# Altium PCB MAB17_sem_malha.PcbDoc (part 2 of 2)
Units mil, origin at the board's own origin, x right, y up, seen from the top; angles counter-clockwise.
Board outline 6100 x 4200 mil, 2 copper layers (Top Layer, Bottom Layer); 83 components, 57 nets, 272 pads, 21 vias.
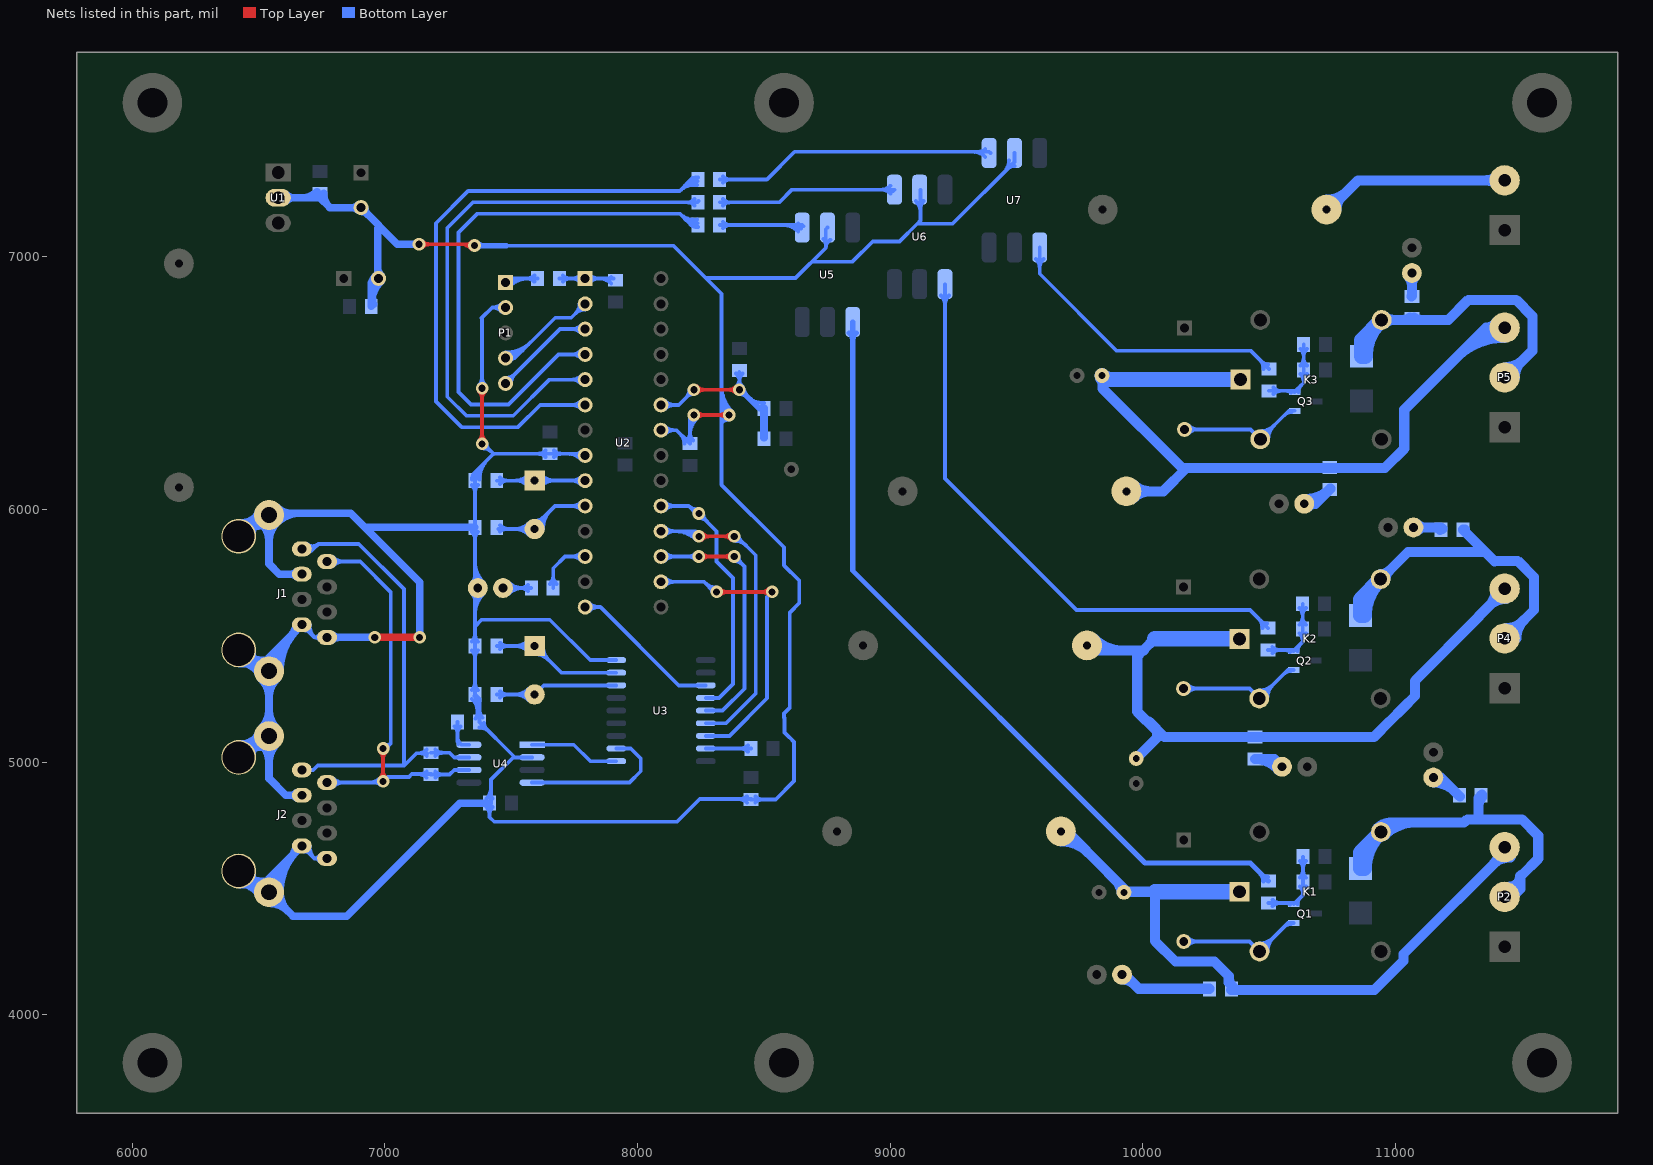
[diagram p2: the nets of this part, all layers, seen from the top]

## Via types
v1: diameter 50, hole 28, Top Layer to Bottom Layer, 21 vias

## Nets (pads, with @x,y where several pads share a name; then routed paths per layer and width w, separated by ;. In a path a pad name is that pad's centre, name@x,y a point inside that pad or via, vN(x,y) a via of type N, cw(c..) or ccw(c..) an arc to the next point about the centre after c; other vN are vias at no path point) (continued)
CAN_GND: C1.2 C2.2 C3.2 C4.1 C5.1 C6.1 C7.1 C8.1 C11.2 C12.1 C13.1 C14.2 J1.3 J1.7 J1.8 J1.S J2.3 J2.7 J2.8 J2.S LD1.2 P1.2 R7.2 U1.2 U2.8 U2.22 U3.9 U4.2 U5.2 U6.2 U7.2 | length 24567.2
  Top Layer w15: v1(7135,7050) v1@7339.5,7050 ; v1@7147.37,7037.63 cw(c7177.25,7007.75) 7177.25,7050 cw(c7177.25,7092.25) v1@7147.37,7062.37 ; 7300.68,7050 cw(c7300.68,6990.68) v1@7342.63,7032.63 ; 7324.82,7050 ccw(c7324.82,7075.18) v1@7342.63,7057.37 ; v1@7372.63,6272.37 ccw(c7342.75,6302.25) 7385,6302.25 ccw(c7427.25,6302.25) v1@7397.37,6272.37 ; v1@7372.63,6467.63 cw(c7342.75,6437.75) 7385,6437.75 cw(c7427.25,6437.75) v1@7397.37,6467.63 ; v1(7385,6260) v1(7385,6480) ; v1(8223,6374) v1(8363,6374) ; v1@8235.37,6361.63 cw(c8265.25,6331.75) 8265.25,6374 cw(c8265.25,6416.25) v1@8235.37,6386.37 ; v1@8350.63,6361.63 ccw(c8320.75,6331.75) 8320.75,6374 ccw(c8320.75,6416.25) v1@8350.63,6386.37
  Top Layer w20: v1@7339.5,7050 7344.5,7045 v1(7355,7045)
  Top Layer w30: v1(6960,5494) v1(7138,5494)
  Bottom Layer w15: J2.7@6671.43,4669 6721.43,4619 ; J1.7@6671.43,5544 6721.43,5494 ; J2.7@6681.27,4646.97 cw(c6681.27,4617.56) 6702.07,4638.36 ; J1.7@6681.27,5521.97 cw(c6681.27,5492.56) 6702.07,5513.36 ; J2.7@6688.28,4668.52 ccw(c6721.99,4666.22) 6698.1,4642.33 ; J1.7@6688.28,5543.52 ccw(c6721.99,5541.22) 6698.1,5517.33 ; J2.7@6703.24,4667.5 ccw(c6765.66,4663.24) 6721.42,4619 ; J1.7@6703.24,5542.5 ccw(c6765.66,5538.24) 6721.42,5494 ; J2.8@6743.01,4607.16 ccw(c6721.43,4593.41) 6721.43,4619 ; J2.8@6743.01,4630.84 cw(c6721.43,4644.59) 6721.43,4619 ; J1.8@6743.01,5482.16 ccw(c6721.43,5468.41) 6721.43,5494 ; J1.8@6743.01,5505.84 cw(c6721.43,5519.59) 6721.43,5494 ; J2.8@6771.43,4619 6721.43,4619 ; J1.8@6771.43,5494 6721.43,5494 ; C13.1@7343.59,5251.21 cw(c7268.7,5176.32) R7.2@7374.61,5176.32 ; C13.1@7343.59,5284.67 ccw(c7312.71,5315.55) 7356.39,5315.55 ccw(c7400.06,5315.55) C13.1@7369.18,5284.67 ; C12.1@7343.59,5443.33 cw(c7312.71,5412.45) 7356.39,5412.45 cw(c7400.06,5412.45) C12.1@7369.18,5443.33 ; C12.1@7343.59,5476.79 ccw(c7312.71,5507.67) 7356.39,5507.67 ccw(c7400.06,5507.67) C12.1@7369.18,5476.79 ; C8.1@7343.59,5912.27 cw(c7312.71,5881.39) 7356.39,5881.39 cw(c7400.06,5881.39) C8.1@7369.18,5912.27 ; C7.1@7343.59,6097.27 cw(c7312.71,6066.39) 7356.39,6066.39 cw(c7400.06,6066.39) C7.1@7369.18,6097.27 ; C7.1@7344.48,6117.94 cw(c7386.82,6117.94) 7356.88,6147.88 ; LD1.2@7345.46,5666.46 cw(c7319.1,5640.1) 7356.39,5640.1 ; LD1.2@7345.46,5711.54 ccw(c7319.1,5737.9) 7356.39,5737.9 ; C7.1@7348.21,6134.07 ccw(c7341.46,6147.38) 7356.39,6147.38 ; C13.1@7354.2,5261.81 cw(c7304.92,5212.53) 7374.61,5212.53 ; 7356.39,5584.02 cw(c7472.98,5584.02) LD1.2@7390.54,5666.46 ; 7356.39,5620.23 cw(c7436.77,5620.23) LD1.2@7379.93,5677.07 ; 7356.39,5757.77 ccw(c7436.77,5757.77) LD1.2@7379.93,5700.93 ; 7356.39,5793.98 ccw(c7472.98,5793.98) LD1.2@7390.54,5711.54 ; R7.2@7358.95,5171.98 ccw(c7310.88,5199.73) 7364.49,5214.1 ; C7.1@7359.48,6117.94 cw(c7438.03,6117.94) 7382.49,6173.49 ; R7.2@7361.82,5175.73 ccw(c7330.94,5206.61) 7374.61,5206.61 ccw(c7418.29,5206.61) R7.2@7387.41,5175.73 ; C7.1@7364.56,6134.07 cw(c7371.31,6147.38) 7356.39,6147.38 ; 7368.82,5197.94 ccw(c7399.58,5206.19) R7.2@7383.66,5178.6 ; v1@7372.63,6492.37 ccw(c7342.75,6522.25) 7385,6522.25 ccw(c7427.25,6522.25) v1@7397.37,6492.37 ; C7.1@7374.48,6117.94 cw(c7489.25,6117.94) 7408.09,6199.09 ; R7.2@7374.61,5136.97 cw(c7374.61,5083.79) 7412.22,5121.4 ; 7383,6758 7385,6760 ; v1@7385,6242.5 cw(c7385,6188.18) 7423.41,6226.59 ; v1(7385,6260) 7385,6265 7429.5,6220.5 ; v1(7385,6480) 7385,6760 ; R7.2@7392.7,5155.06 ccw(c7426.87,5155.06) 7402.71,5130.9 ; C11.2@7401.9,4822.27 cw(c7371.02,4791.39) 7414.69,4791.39 cw(c7458.37,4791.39) C11.2@7427.48,4822.27 ; C11.2@7401.9,4855.73 ccw(c7357,4900.63) 7420.5,4900.63 ; v1@7402.5,6260 ccw(c7432.68,6260) 7411.34,6238.66 ; C11.2@7414.69,4830 7414.69,4782.31 7433,4764 8156.64,4764 8246.64,4854 C14.2@8449.69,4854 ; C11.2@7420.5,4844.81 7420.5,4931.5 7508,5019 ; 7420.5,4872.59 ccw(c7444.35,4872.59) C11.2@7427.48,4855.73 ; 7427.24,6800 ccw(c7427.24,6849.76) P1.2@7462.42,6814.58 ; 7430,6220 7429.5,6220.5 ; P1.2@7461.9,6783.97 ccw(c7425,6749.53) 7425,6800 ; P1.2@7480,6800 7477,6800 7425,6800 ; 7481.39,7044 8143,7044 8333,6854 8333,6344 ; U4.2@7583,5019 7508,5019 ; C1.2@7636.27,6207.9 ccw(c7605.39,6177.02) 7605.39,6220.69 ccw(c7605.39,6264.37) C1.2@7636.27,6233.48 ; C1.2@7669.73,6207.9 cw(c7700.61,6177.02) 7700.61,6220.69 cw(c7700.61,6264.37) C1.2@7669.73,6233.48 ; 7723.66,6220.69 cw(c7723.66,6144.66) U2.8@7777.42,6198.42 ; 7755.98,6220.69 ccw(c7755.98,6251.02) U2.8@7777.42,6229.58 ; 7759.88,6220.69 cw(c7759.88,6180.88) U2.8@7788.03,6209.03 ; U2.8@7793,6214 7786.31,6220.69 C1.2@7653,6220.69 7429.69,6220.69 7429.5,6220.5 ; U3.9@7915.83,5404 7813,5404 7653,5564 7383,5564 7356.39,5537.39 ; U2.22@8093,6314 8154.61,6314 C6.1@8208,6260.61 8208,6359 v1(8223,6374) ; U2.22@8108.58,6298.42 cw(c8146.18,6260.82) 8146.18,6314 cw(c8146.18,6367.18) U2.22@8108.58,6329.58 ; 8170.4,6298.22 cw(c8132.79,6260.61) C6.1@8185.97,6260.61 ; 8179.9,6288.71 ccw(c8204.06,6312.87) C6.1@8204.06,6278.7 ; C6.1@8195.21,6273.41 ccw(c8164.33,6304.29) 8208,6304.29 ccw(c8251.67,6304.29) C6.1@8220.79,6273.41 ; 8208,6295.54 cw(c8301.46,6295.54) v1@8235.37,6361.63 ; 8208,6331.75 cw(c8265.25,6331.75) v1@8224.77,6372.23 ; 8272,6916 8626,6916 8745,7035 8745,7109 U5.2@8752,7116 ; 8333,6380.04 ccw(c8369.04,6380.04) 8343.55,6354.55 ; 8333,6416.25 ccw(c8405.25,6416.25) v1@8354.16,6365.16 ; 8333,6452.46 ccw(c8441.46,6452.46) v1@8364.77,6375.77 ; 8333,6488.68 ccw(c8477.68,6488.68) v1@8375.37,6386.37 ; v1@8345.5,6374 cw(c8303.25,6374) 8333.13,6344.13 cw(c8363,6314.25) v1@8363,6356.5 ; v1(8363,6374) 8333,6344 ; 8398.18,4854 cw(c8398.18,4804.81) C14.2@8432.96,4839.59 ; 8405.98,4854 ccw(c8405.98,4892.16) C14.2@8432.96,4865.18 ; C14.2@8449.69,4852.39 8547.39,4852.39 8620,4925 8620,5080 8600.94,5099.06 8599.4,5099.06 8581.31,5117.15 8581.31,5175.95 8580,5177.25 8580,5192.8 8603,5215.8 8603,5591.97 8640.5,5629.47 8640.5,5718.53 8580,5779.03 8580,5850.64 8333,6097.64 8333,6344 ; C14.2@8466.42,4839.59 cw(c8497.3,4808.71) 8497.3,4852.39 cw(c8497.3,4896.06) C14.2@8466.42,4865.18 ; 8695,6981 8851,6981 8931,7061 9037,7061 9107,7131 ; U5.2@8736.42,7070.9 cw(c8715.72,7050.19) 8745,7050.19 ; 8745,7034.53 cw(c8783.96,7034.53) U5.2@8763.54,7067.71 ; U6.2@9101.42,7220.9 cw(c9056.58,7176.05) 9120,7176.05 ; 9120,7190.54 cw(c9162.94,7190.54) U6.2@9132.58,7220.9 ; U6.2@9120,7265 9120,7144 9107,7131 ; 9450.53,7334.53 ccw(c9403.58,7381.47) U7.2@9469.97,7381.47 ; 9463.74,7347.74 cw(c9492,7319.48) U7.2@9492,7359.44 ; U7.2@9492,7411 9492,7376 9247,7131 9107,7131 ; 7356.39,5537.39 C8.1@7356.39,5929 C7.1@7356.39,6114 7356.39,6147.39 ; 7356.39,5537.39 C12.1@7356.39,5460.06 C13.1@7356.39,5267.94 7374.61,5249.71 R7.2@7374.61,5159 7508,5025.61 7508,5019 ; 7356.39,6147.39 7429.5,6220.5 ; 7385,6760 7425,6800
  Bottom Layer w20: v1(7355,7045) 7356,7044 7481.39,7044 ; v1@7365.61,7034.39 cw(c7388.8,7011.2) 7388.8,7044 ; v1@7365.61,7055.61 ccw(c7393.63,7083.63) 7393.63,7044
  Bottom Layer w30: J2.S@6424.89,5072.79 ccw(c6431.61,5177.31) 6505.67,5103.25 ccw(c6579.74,5029.18) J2.S@6475.21,5022.46 ; J1.S@6424.89,5947.79 ccw(c6431.61,6052.31) 6505.67,5978.25 ccw(c6579.74,5904.18) J1.S@6475.21,5897.46 ; J2.S@6425.08,4515.23 cw(c6432.08,4411.95) J2.S@6505.28,4485.15 ; J1.S@6425.08,5390.23 cw(c6432.08,5286.95) J1.S@6505.28,5360.15 ; J2.S@6465.34,4525.09 ccw(c6529.51,4589.26) J2.S@6539.9,4499.1 ; J1.S@6465.34,5400.09 ccw(c6529.51,5464.26) J1.S@6539.9,5374.1 ; J2.S@6465.6,5063.17 cw(c6529.96,4998.81) J2.S@6539.96,5089.28 ; J1.S@6465.6,5938.17 cw(c6529.96,5873.81) J1.S@6539.96,5964.28 ; 6467.68,5081.31 cw(c6483.78,5053.42) J2.S@6508.15,5074.46 ; 6467.68,5956.31 cw(c6483.78,5928.42) J1.S@6508.15,5949.46 ; 6467.93,4506.71 ccw(c6483.77,4534.13) J2.S@6507.91,4513.64 ; 6467.93,5381.71 ccw(c6483.77,5409.13) J1.S@6507.91,5388.64 ; J2.S@6475.2,4565.35 ccw(c6578.47,4558.34) J2.S@6505.28,4485.15 ; J1.S@6475.2,5440.35 ccw(c6578.47,5433.34) J1.S@6505.28,5360.15 ; 6477.89,5087.21 ccw(c6455.29,5126.35) J2.S@6498.95,5114.65 ; 6477.89,5962.21 ccw(c6455.29,6001.35) J1.S@6498.95,5989.65 ; 6478.2,4500.78 cw(c6455.94,4462.21) J2.S@6498.95,4473.74 ; 6478.2,5375.78 cw(c6455.94,5337.21) J1.S@6498.95,5348.74 ; 6487.29,4516.3 ccw(c6522.68,4536.72) J2.S@6536.68,4498.34 ; 6487.29,5391.3 ccw(c6522.68,5411.72) J1.S@6536.68,5373.34 ; 6487.6,5071.94 cw(c6523.03,5051.49) J2.S@6536.78,5090.01 ; 6487.6,5946.94 cw(c6523.03,5926.49) J1.S@6536.78,5965.01 ; J2.S@6510.35,5072.1 cw(c6435.15,4996.89) 6541.5,4996.89 cw(c6647.86,4996.89) J2.S@6572.66,5072.1 ; J2.S@6510.35,5134.4 ccw(c6435.15,5209.61) 6541.5,5209.61 ccw(c6647.86,5209.61) J2.S@6572.66,5134.4 ; J1.S@6510.35,5328.99 cw(c6435.15,5253.78) 6541.5,5253.78 cw(c6647.86,5253.78) J1.S@6572.66,5328.99 ; J1.S@6510.35,5947.1 cw(c6435.15,5871.89) 6541.5,5871.89 cw(c6647.86,5871.89) 6572.66,5947.1 cw(c6664.15,5855.6) 6664.15,5985 ; J2.S@6525.56,4485.14 cw(c6617.28,4485.14) 6552.42,4550 ; J1.S@6525.56,5360.14 cw(c6617.28,5360.14) 6552.42,5425 ; J2.S@6536.46,4528.91 cw(c6520.43,4668) J2.S@6421.43,4569 J2.S@6505.28,4485.14 ; J1.S@6536.46,5403.91 cw(c6520.43,5543) J1.S@6421.43,5444 J1.S@6505.28,5360.14 ; J2.S@6536.66,5059.46 ccw(c6521.17,4919.27) J2.S@6421.43,5019 6505.68,5103.25 J2.S@6541.5,5103.25 ; J1.S@6536.66,5934.46 ccw(c6521.17,5794.27) J1.S@6421.43,5894 6505.68,5978.25 J1.S@6541.5,5978.25 6541.5,5785.5 6583,5744 J1.3@6671.43,5744 ; J2.S@6541.5,4441.09 cw(c6541.5,4334.73) 6616.71,4409.93 cw(c6691.92,4485.14) 6585.56,4485.14 cw(c6822.13,4485.14) J2.7@6654.85,4652.42 ; J2.S@6555.56,4485.14 cw(c6719.71,4485.14) 6603.64,4601.21 ; J1.S@6555.56,5360.14 cw(c6719.71,5360.14) 6603.64,5476.21 ; J1.S@6560,5980 6545,5980 6550,5985 6865,5985 7138,5712 v1(7138,5494) ; J1.S@6572.66,6009.4 ccw(c6631.57,6068.32) 6631.57,5985 ; U1.2@6578,7234 6743,7234 6783,7194 C2.2@6905,7194 ; J1.S@6585.56,5360.14 cw(c6822.13,5360.14) J1.7@6654.85,5527.42 ; U1.2@6607.14,7219.86 cw(c6641.28,7185.72) 6641.28,7234 cw(c6641.28,7282.28) U1.2@6607.14,7248.14 ; 6629.82,4627.4 ccw(c6588.22,4669) J2.7@6647.06,4669 ; 6629.82,5502.4 ccw(c6588.22,5544) J1.7@6647.06,5544 ; J2.3@6651.31,4858.73 ccw(c6626.51,4833.93) 6626.51,4869 ccw(c6626.51,4904.07) J2.3@6651.31,4879.27 ; J1.3@6651.31,5733.73 ccw(c6626.51,5708.93) 6626.51,5744 ccw(c6626.51,5779.07) J1.3@6651.31,5754.27 ; J2.7@6671.43,4669 6541.5,4539.08 J2.S@6541.5,4485.14 ; J2.3@6671.43,4869 6608,4869 6541.5,4935.5 J2.S@6541.5,5103.25 ; J1.7@6671.43,5544 6541.5,5414.08 J1.S@6541.5,5360.14 ; 6673.19,7234 ccw(c6673.19,7316.56) C4.1@6731.57,7258.18 ; C4.1@6757.53,7250.69 ccw(c6832.9,7250.69) 6779.6,7197.4 ; J1.8@6771.43,5494 v1(6960,5494) ; J1.8@6791.54,5483.73 cw(c6816.34,5458.93) 6816.34,5494 cw(c6816.34,5529.07) J1.8@6791.54,5504.27 ; 6867.37,7194 ccw(c6867.37,7233.63) C2.2@6895.39,7205.61 ; 6872.2,7194 cw(c6872.2,7161.2) C2.2@6895.39,7184.39 ; C2.2@6905,7195 C2.2@6905,7194 ; C2.2@6906,7180 cw(c6906,7146.2) 6929.9,7170.1 ; C2.2@6921,7195 ccw(c6959.63,7195) 6932.31,7167.69 ; 6922,5930 6923,5929 C8.1@7356.39,5929 ; C5.1@6946.31,6804 6946.31,6897.31 6971.9,6922.9 6971.9,7113.1 6975,7110 6975,7115 ; C5.1@6946.31,6809.76 cw(c7080.13,6809.76) C3.2@6985.5,6904.39 ; 6946.31,6882.19 cw(c7007.71,6882.19) C3.2@6964.29,6925.61 ; 6952.76,6833.86 ccw(c6979.02,6826.82) C5.1@6955.48,6813.23 ; 6971.9,6958.46 ccw(c7018.35,6958.46) C3.2@6985.5,6925.61 ; v1(7135,7050) 7050,7050 6906,7194 C2.2@6905,7194 ; C11.2@7414,4838 7297,4838 6849,4390 6636.65,4390 J2.S@6541.5,4485.14 ; P1.2@7477,6800 P1.2@7478,6799 P1.2@7483,6794 ; J2.S@6505.28,4485.14 J2.S@6541.5,4485.14 ; J1.S@6505.28,5360.14 J1.S@6541.5,5360.14 ; J2.S@6541.5,5103.25 J1.S@6541.5,5360.14
CAN_H: J1.1 J2.1 R6.2 U4.7 | length 2196.1
  Bottom Layer w15: J2.1@6671.43,4969 6716.79,4969 6734.29,4986.5 7076.5,4986.5 7125,5035 7166,5035 R6.2@7167,5034 ; J1.1@6676.37,5837.71 ccw(c6693.29,5859.45) 6712.76,5839.97 ; J1.1@6685.58,5849.55 ccw(c6703.8,5872.96) 6724.78,5851.99 ; J1.1@6691.43,5864 J1.1@6671.43,5844 6716.79,5844 ; J1.1@6694.79,5861.39 ccw(c6714.31,5886.48) 6736.79,5864 ; J1.1@6701,5834.21 cw(c6716.79,5826.37) 6716.79,5844 ; J1.1@6701,5853.79 ccw(c6716.79,5861.63) 6716.79,5844 ; 7075,4990 7075.5,4990.5 7075.5,5685.14 6896.64,5864 6736.79,5864 ; 7129.82,5035 ccw(c7129.82,5086.55) R6.2@7166.27,5050.1 ; 7140.96,5035 cw(c7140.96,4999.2) R6.2@7166.27,5024.52 ; R6.2@7183,5037.31 7256.48,5037.31 7274.79,5019 U4.7@7333,5019 ; R6.2@7199.73,5024.52 cw(c7230.61,4993.63) 7230.61,5037.31 cw(c7230.61,5080.98) R6.2@7199.73,5050.1 ; 6716.79,5844 6736.79,5864
CAN_L: J1.2 J2.2 R6.1 U4.6 | length 2187.9
  Top Layer w15: v1@6980.63,4936.37 ccw(c6950.75,4966.25) 6993,4966.25 ccw(c7035.25,4966.25) v1@7005.37,4936.37 ; v1@6980.63,5041.63 cw(c6950.75,5011.75) 6993,5011.75 cw(c7035.25,5011.75) v1@7005.37,5041.63 ; v1(6993,4924) v1(6993,5054)
  Bottom Layer w15: J2.2@6771.43,4919 v1@6988,4919 ; J1.2@6771.43,5794 6903,5794 7023,5674 7023,5074 ; J2.2@6796.84,4903.42 cw(c6834.45,4865.82) 6834.45,4919 cw(c6834.45,4972.18) J2.2@6796.84,4934.58 ; J1.2@6796.84,5778.42 cw(c6834.45,5740.82) 6834.45,5794 cw(c6834.45,5847.18) J1.2@6796.84,5809.58 ; 6938.68,4919 ccw(c6938.68,4978.32) v1@6980.63,4936.37 ; 6962.82,4919 cw(c6962.82,4893.82) v1@6980.63,4911.63 ; v1(6993,4924) 7010.5,4941.5 7095.14,4941.5 7106.64,4953 R6.1@7183,4953 ; v1(6993,5054) 7003,5054 7023,5074 ; v1@7000.28,5069.91 ccw(c7008.7,5088.3) 7023,5074 ; v1@7010.5,5054 cw(c7028.61,5054) 7015.8,5066.8 ; 7129.82,4953 cw(c7129.82,4901.45) R6.1@7166.27,4937.9 ; 7140.96,4953 ccw(c7140.96,4988.8) R6.1@7166.27,4963.48 ; R6.1@7183,4950.69 7256.48,4950.69 7274.79,4969 U4.6@7333,4969 ; R6.1@7199.73,4937.9 cw(c7230.61,4907.02) 7230.61,4950.69 cw(c7230.61,4994.37) R6.1@7199.73,4963.48
LED: R1.2 U2.12 | length 376.5
  Bottom Layer w15: R1.2@7653.52,5705.73 ccw(c7622.63,5736.61) 7666.31,5736.61 ccw(c7709.98,5736.61) R1.2@7679.1,5705.73 ; R1.2@7666.31,5689 7666.31,5767.31 7713,5814 U2.12@7793,5814 ; U2.12@7777.42,5798.42 ccw(c7739.82,5760.82) 7739.82,5814 ccw(c7739.82,5867.18) U2.12@7777.42,5829.58
MCP2515_INT: U2.14 U3.12 | length 689.1
  Bottom Layer w15: U2.14@7793,5614 7853,5614 8163,5304 U3.12@8270.17,5304 ; U2.14@7808.58,5598.42 cw(c7846.18,5560.82) 7846.18,5614 cw(c7846.18,5667.18) U2.14@7808.58,5629.58
MCP2515_MISO: U2.18 U3.15 | length 1666
  Top Layer w15: v1(8243,5894) v1(8383,5894) ; v1@8255.37,5881.63 cw(c8285.25,5851.75) 8285.25,5894 cw(c8285.25,5936.25) v1@8255.37,5906.37 ; v1@8370.63,5881.63 ccw(c8340.75,5851.75) 8340.75,5894 ccw(c8340.75,5936.25) v1@8370.63,5906.37
  Bottom Layer w15: U2.18@8093,5914 8223,5914 v1(8243,5894) ; U2.18@8108.58,5898.42 cw(c8146.18,5860.82) 8146.18,5914 cw(c8146.18,5967.18) U2.18@8108.58,5929.58 ; 8152.47,5914 cw(c8152.47,5803.47) v1@8230.63,5881.63 ; 8188.68,5914 cw(c8188.68,5839.68) v1@8241.23,5892.23 ; 8224.89,5914 cw(c8224.89,5875.89) v1@8251.84,5902.84 ; U3.15@8270.17,5154 8350.28,5154 8468,5271.72 8468,5819 8393,5894 v1(8383,5894) ; v1@8383,5876.5 cw(c8383,5810.11) 8429.95,5857.05 ; v1@8400.5,5894 ccw(c8418.61,5894) 8405.8,5881.2
MCP2515_MOSI: U2.17 U3.14 | length 1377.8
  Top Layer w15: v1(8243,5814) v1(8383,5814) v1@8393,5814 ; v1@8255.37,5801.63 cw(c8285.25,5771.75) 8285.25,5814 cw(c8285.25,5856.25) v1@8255.37,5826.37 ; v1@8370.63,5801.63 ccw(c8340.75,5771.75) 8340.75,5814 ccw(c8340.75,5856.25) v1@8370.63,5826.37
  Bottom Layer w15: U2.17@8093,5814 v1(8243,5814) ; U2.17@8108.58,5798.42 cw(c8146.18,5760.82) 8146.18,5814 cw(c8146.18,5867.18) U2.17@8108.58,5829.58 ; v1@8230.63,5801.63 ccw(c8200.75,5771.75) 8200.75,5814 ccw(c8200.75,5856.25) v1@8230.63,5826.37 ; U3.14@8270.17,5204 8336.64,5204 8423,5290.36 8423,5774 v1(8383,5814) ; v1@8383,5796.5 cw(c8383,5754.25) 8412.87,5784.13 cw(c8442.75,5814) v1@8400.5,5814
MCP2515_SCK: U2.19 U3.13 | length 1229.2
  Bottom Layer w15: U2.19@8093,6014 8203,6014 ; U2.19@8108.58,5998.42 cw(c8146.18,5960.82) 8146.18,6014 cw(c8146.18,6067.18) U2.19@8108.58,6029.58 ; 8220.2,5996.8 cw(c8207.39,5984) v1@8225.5,5984 ; v1@8240.62,6001.34 cw(c8234.56,6045.56) 8203,6014 ; v1@8243,5966.5 cw(c8243,5924.25) 8272.87,5954.13 cw(c8302.75,5984) v1@8260.5,5984 ; U3.13@8270.17,5254 8323,5254 8378,5309 8378,5729 8313,5794 8313,5914 v1(8243,5984) 8233,5994 8223,5994 8203,6014
MCP2515_SS: U2.16 U3.16 | length 1473
  Top Layer w15: v1(8313,5674) v1(8533,5674) ; v1@8325.37,5661.63 cw(c8355.25,5631.75) 8355.25,5674 cw(c8355.25,5716.25) v1@8325.37,5686.37 ; v1@8520.63,5661.63 ccw(c8490.75,5631.75) 8490.75,5674 ccw(c8490.75,5716.25) v1@8520.63,5686.37
  Bottom Layer w15: U2.16@8093,5714 8263,5714 8303,5674 v1(8313,5674) ; U2.16@8108.58,5698.42 cw(c8146.18,5660.82) 8146.18,5714 cw(c8146.18,5767.18) U2.16@8108.58,5729.58 ; 8266.05,5710.95 ccw(c8313,5757.89) v1@8313,5691.5 ; U3.16@8270.17,5104 8363.92,5104 8513,5253.08 8513,5654 v1(8533,5674) ; 8290.2,5686.8 cw(c8277.39,5674) v1@8295.5,5674
NetC9_1: C9.1 R3.2 U2.1 | length 519.3
  Bottom Layer w15: C9.1@7691.31,6914 U2.1@7793,6914 R3.2@7906.31,6914 ; C9.1@7704.1,6901.21 cw(c7734.98,6870.33) 7734.98,6914 cw(c7734.98,6957.67) C9.1@7704.1,6926.79 ; U2.1@7777.42,6898.42 ccw(c7739.82,6860.82) 7739.82,6914 ccw(c7739.82,6967.18) U2.1@7777.42,6929.58 ; U2.1@7808.58,6898.42 cw(c7846.18,6860.82) 7846.18,6914 cw(c7846.18,6967.18) U2.1@7808.58,6929.58 ; 7849.23,6914 cw(c7849.23,6847.47) R3.2@7896.27,6894.52 ; 7881.55,6914 ccw(c7881.55,6934.82) R3.2@7896.27,6920.1
NetC12_2: C12.2 U3.8 Y2.1 | length 964.6
  Bottom Layer w15: C12.2@7443,5460.06 Y2.1@7593,5460.06 7699.06,5354 U3.8@7915.83,5354 ; C12.2@7455.79,5447.27 cw(c7486.67,5416.39) 7486.67,5460.06 cw(c7486.67,5503.74) C12.2@7455.79,5472.85 ; Y2.1@7570.02,5437.08 ccw(c7514.54,5381.6) 7514.54,5460.06 ccw(c7514.54,5538.52) Y2.1@7570.02,5483.04 ; Y2.1@7580.63,5447.69 ccw(c7550.75,5417.81) 7550.75,5460.06 ccw(c7550.75,5502.31) Y2.1@7580.63,5472.44 ; Y2.1@7593,5427.56 cw(c7593,5349.1) 7648.48,5404.58 cw(c7703.96,5460.06) Y2.1@7625.5,5460.06 ; Y2.1@7593,5442.56 cw(c7593,5400.31) 7622.87,5430.19 cw(c7652.75,5460.06) Y2.1@7610.5,5460.06
NetC13_2: C13.2 U3.7 Y2.2 | length 746
  Bottom Layer w15: C13.2@7443,5267.94 Y2.2@7593,5267.94 7629.06,5304 U3.7@7915.83,5304 ; C13.2@7455.79,5255.15 cw(c7486.67,5224.26) 7486.67,5267.94 cw(c7486.67,5311.61) C13.2@7455.79,5280.73 ; Y2.2@7570.02,5244.96 ccw(c7514.54,5189.48) 7514.54,5267.94 ccw(c7514.54,5346.4) Y2.2@7570.02,5290.92 ; Y2.2@7580.63,5255.56 ccw(c7550.75,5225.69) 7550.75,5267.94 ccw(c7550.75,5310.19) Y2.2@7580.63,5280.31
NetC15_1: C15.1 F2.1 K1.1 P2.3 R10.2 | length 3266.9
  Bottom Layer w40: F2.1@9676,4686.94 cw(c9676,4537.13) 9781.93,4643.07 ; F2.1@9676,4726 9699,4726 9859.94,4565.06 9859.94,4564.53 9906.53,4517.94 ; 9899.23,4525.24 cw(c9858.99,4485) C15.1@9915.9,4485 ; C15.1@9916.06,4486.74 ccw(c9882.12,4493.06) 9906.53,4517.47 ; C15.1@9916.07,4486.81 ccw(c9881.97,4493.39) 9906.53,4517.94 ; C15.1@9926.69,4494.44 cw(c9929.76,4517.47) 9906.53,4517.47 ; C15.1@9926.82,4494.42 cw(c9930.3,4517.94) 9906.53,4517.94 ; C15.1@9928,4484 9931.22,4487.22 10048.22,4487.22 10048.22,4291.52 10129.06,4210.69 10282.84,4210.69 10340.28,4153.24 10340.28,4127.72 R10.2@10356,4112 ; C15.1@9936,4488 9906.53,4517.47 ; 10340.28,4147.05 ccw(c10391.42,4147.05) R10.2@10355.26,4110.89 ; R10.2@10349,4099 10916.7,4099 11031.68,4213.98 11031.68,4240.38 P2.3@11455,4663.7 ; P2.3@11415,4663.7 cw(c11318.43,4663.7) 11386.72,4595.42 cw(c11455,4527.13) P2.3@11455,4623.7 ; P2.3@11447,4672 P2.3@11457,4662 ; 9906.53,4517.47 9906.53,4517.94
  Bottom Layer w60: 10048.22,4487.22 K1.1@10383.26,4487.22
NetC16_2: C16.2 Q1.2 R11.1 R12.2 | length 623.6
  Bottom Layer w15: R11.1@10497,4442.69 Q1.2@10595.31,4442.69 ; R11.1@10513.73,4429.9 cw(c10544.61,4399.02) 10544.61,4442.69 cw(c10544.61,4486.37) R11.1@10513.73,4455.48 ; 10566.11,4442.69 cw(c10566.11,4417.63) Q1.2@10583.83,4435.35 ; Q1.2@10597.71,4438.4 10633.69,4474.39 R12.2@10633.69,4526 C16.2@10633.69,4626 ; Q1.2@10612.85,4438.4 cw(c10649.39,4438.4) 10623.55,4464.24 ; R12.2@10620.9,4509.27 cw(c10590.02,4478.39) 10633.69,4478.39 cw(c10677.37,4478.39) R12.2@10646.48,4509.27 ; R12.2@10620.9,4542.73 ccw(c10590.02,4573.61) 10633.69,4573.61 ccw(c10677.37,4573.61) R12.2@10646.48,4542.73 ; C16.2@10620.9,4609.27 cw(c10590.02,4578.39) 10633.69,4578.39 cw(c10677.37,4578.39) C16.2@10646.48,4609.27
NetC17_1: C17.1 F4.1 K2.1 P4.3 R15.2 | length 3141.8
  Bottom Layer w40: F4.1@9779,5462 9799,5442 10001,5442 ; F4.1@9806.62,5489.62 ccw(c9921.57,5604.57) 9921.57,5442 ; C17.1@9974,5014.43 10056,5096.43 10056,5124 10054,5124 9978,5200 9978,5419 10001,5442 ; 10004,5442 10001,5442 ; 10025,5160 10086,5099 10914,5099 10977.63,5162.63 10978.33,5162.63 11030.68,5214.98 11030.68,5215.68 11077,5262 11077,5322 11330,5575 ; 10047.22,5488.22 10001,5442 ; 11328,5576 P4.3@11442,5690 ; 11369.22,5617.22 ccw(c11299.74,5686.7) P4.3@11398,5686.7 ; 11370.91,5618.91 cw(c11438,5551.82) P4.3@11438,5646.7
  Bottom Layer w60: 10047.22,5488.22 K2.1@10382.26,5488.22
NetC18_2: C18.2 Q2.2 R16.1 R17.2 | length 623.6
  Bottom Layer w15: R16.1@10496,5443.69 Q2.2@10594.31,5443.69 ; R16.1@10512.73,5430.9 cw(c10543.61,5400.02) 10543.61,5443.69 cw(c10543.61,5487.37) R16.1@10512.73,5456.48 ; 10565.11,5443.69 cw(c10565.11,5418.63) Q2.2@10582.83,5436.35 ; Q2.2@10596.71,5439.4 10632.69,5475.39 R17.2@10632.69,5527 C18.2@10632.69,5627 ; Q2.2@10611.85,5439.4 cw(c10648.39,5439.4) 10622.55,5465.24 ; R17.2@10619.9,5510.27 cw(c10589.02,5479.39) 10632.69,5479.39 cw(c10676.37,5479.39) R17.2@10645.48,5510.27 ; R17.2@10619.9,5543.73 ccw(c10589.02,5574.61) 10632.69,5574.61 ccw(c10676.37,5574.61) R17.2@10645.48,5543.73 ; C18.2@10619.9,5610.27 cw(c10589.02,5579.39) 10632.69,5579.39 cw(c10676.37,5579.39) C18.2@10645.48,5610.27
NetC19_1: C19.1 F5.1 K3.1 P5.3 R20.2 | length 3558.2
  Bottom Layer w40: C19.1@9840,6530 9840,6520 9840,6480 10155,6165 10958.7,6165 11034.68,6240.98 11034.68,6395.38 11359,6719.7 ; F5.1@9935,6072 10081,6072 10173,6164 ; F5.1@9962.62,6044.38 cw(c10029.29,5977.71) 10029.29,6072 cw(c10029.29,6166.29) F5.1@9962.62,6099.62 ; 11239.1,6599.8 cw(c11432,6406.89) P5.3@11432,6679.7 ; 11307.38,6668.08 cw(c11432,6543.46) P5.3@11432,6719.7 ; P5.3@11398.29,6698.18 ccw(c11359,6673.09) 11359,6719.7 ; P5.3@11398.29,6741.23 cw(c11359,6766.31) 11359,6719.7 ; P5.3@11436,6717 11433.3,6719.7 P5.3@11432,6719.7 ; 11359,6719.7 P5.3@11432,6719.7
  Bottom Layer w60: C19.1@9838.09,6529.67 ccw(c9875.38,6566.96) 9875.38,6514.22 ; C19.1@9840,6520 9845.78,6514.22 K3.1@10386.26,6514.22
NetC20_2: C20.2 Q3.2 R21.1 R22.2 | length 623.6
  Bottom Layer w15: R21.1@10500,6469.69 Q3.2@10598.31,6469.69 ; R21.1@10516.73,6456.9 cw(c10547.61,6426.02) 10547.61,6469.69 cw(c10547.61,6513.37) R21.1@10516.73,6482.48 ; 10569.11,6469.69 cw(c10569.11,6444.63) Q3.2@10586.83,6462.35 ; Q3.2@10600.71,6465.4 10636.69,6501.39 R22.2@10636.69,6553 C20.2@10636.69,6653 ; Q3.2@10615.85,6465.4 cw(c10652.39,6465.4) 10626.55,6491.24 ; R22.2@10623.9,6536.27 cw(c10593.02,6505.39) 10636.69,6505.39 cw(c10680.37,6505.39) R22.2@10649.48,6536.27 ; R22.2@10623.9,6569.73 ccw(c10593.02,6600.61) 10636.69,6600.61 ccw(c10680.37,6600.61) R22.2@10649.48,6569.73 ; C20.2@10623.9,6636.27 cw(c10593.02,6605.39) 10636.69,6605.39 cw(c10680.37,6605.39) C20.2@10649.48,6636.27
NetD1_1: D1.1 K1.5 Q1.1 | length 798.4
  Bottom Layer w15: D1.1@10162,4290.21 10422.79,4290.21 K1.5@10462,4251 10574.6,4363.6 Q1.1@10597.71,4363.6 ; D1.1@10177.58,4274.64 cw(c10215.18,4237.03) 10215.18,4290.21 cw(c10215.18,4343.39) D1.1@10177.58,4305.79 ; K1.5@10462,4267.87 ccw(c10462,4308.6) 10490.8,4279.8 ccw(c10519.6,4251) K1.5@10478.87,4251 ; K1.5@10462,4282.87 ccw(c10462,4359.81) 10516.41,4305.41 ccw(c10570.81,4251) K1.5@10493.87,4251 ; 10558.55,4347.55 cw(c10586.88,4319.22) Q1.1@10586.88,4359.29
NetD2_2: D2.2 K1.3 P2.2 R8.2 | length 1702.7
  Bottom Layer w40: K1.3@10927.73,4738.03 cw(c10984.71,4681.05) 10984.71,4761.63 ; K1.3@10942.31,4723.44 10980.5,4761.63 11271.15,4761.63 ; K1.3@10956.01,4709.74 cw(c11081.28,4584.48) 11081.28,4761.63 ; 11272,4761 11284.7,4773.7 11328,4773.7 ; 11328.28,4824.95 cw(c11379.42,4824.95) R8.2@11343.26,4861.11 ; R8.2@11342,4871 11328.28,4857.28 11328.28,4773.98 11328,4773.7 ; P2.2@11452.96,4506.8 ccw(c11450.74,4550) 11494,4550 ; P2.2@11456,4461 11494,4499 11494,4550 ; 11328,4773.7 11500.56,4773.7 11565,4709.26 11565,4618.14 11500.56,4553.7 11497.7,4553.7 11494,4550
  Bottom Layer w60: D2.2@10862,4579.58 10862,4643.13 K1.3@10942.31,4723.44 ; D2.2@10877.28,4579.58 cw(c11067.56,4579.58) K1.3@10933.01,4714.14
NetD3_1: D3.1 K2.5 Q2.1 | length 798.4
  Bottom Layer w15: D3.1@10161,5291.21 10421.79,5291.21 K2.5@10461,5252 10573.6,5364.6 Q2.1@10596.71,5364.6 ; D3.1@10176.58,5275.64 cw(c10214.18,5238.03) 10214.18,5291.21 cw(c10214.18,5344.39) D3.1@10176.58,5306.79 ; K2.5@10461,5268.87 ccw(c10461,5309.6) 10489.8,5280.8 ccw(c10518.6,5252) K2.5@10477.87,5252 ; K2.5@10461,5283.87 ccw(c10461,5360.81) 10515.41,5306.41 ccw(c10569.81,5252) K2.5@10492.87,5252 ; 10557.55,5348.55 cw(c10585.88,5320.22) Q2.1@10585.88,5360.29
NetD4_2: D4.2 K2.3 P4.2 R13.2 | length 1662.1
  Bottom Layer w40: K2.3@10941.31,5743.81 ccw(c10941.31,5793.29) 10976.3,5758.3 ; K2.3@10943,5725 11049.65,5831.65 11355.65,5831.65 ; K2.3@10960.68,5724.44 cw(c11004.73,5724.44) 10973.58,5755.58 ; R13.2@11274.26,5920 R13.2@11267.31,5920 11355.65,5831.65 ; P4.2@11438,5492 11548,5602 11548,5732.26 11483.56,5796.7 11392.44,5796.7 11392.31,5796.57 11392.31,5795 11355.65,5831.65 ; P4.2@11438,5529.85 ccw(c11438,5621.23) 11502.61,5556.61 ; P4.2@11478,5489.85 cw(c11579.76,5489.85) 11507.8,5561.8
  Bottom Layer w60: D4.2@10861,5580.58 10861,5644.13 K2.3@10941.31,5724.44 ; D4.2@10876.28,5580.58 cw(c11066.56,5580.58) K2.3@10932.01,5715.14
NetD5_1: D5.1 K3.5 Q3.1 | length 798.4
  Bottom Layer w15: D5.1@10165,6317.21 10425.79,6317.21 K3.5@10465,6278 10577.6,6390.6 Q3.1@10600.71,6390.6 ; D5.1@10180.58,6301.64 cw(c10218.18,6264.03) 10218.18,6317.21 cw(c10218.18,6370.39) D5.1@10180.58,6332.79 ; K3.5@10465,6294.87 ccw(c10465,6335.6) 10493.8,6306.8 ccw(c10522.6,6278) K3.5@10481.87,6278 ; K3.5@10465,6309.87 ccw(c10465,6386.81) 10519.41,6332.41 ccw(c10573.81,6278) K3.5@10496.87,6278 ; 10561.55,6374.55 cw(c10589.88,6346.22) Q3.1@10589.88,6386.29
NetD6_2: D6.2 K3.3 P5.2 R18.2 | length 1561.1
  Bottom Layer w40: K3.3@10945.31,6750.44 11209.15,6750.44 11288.41,6829.7 11477.56,6829.7 11542,6765.26 11542,6628 P5.2@11428,6514 ; K3.3@10959.01,6736.74 cw(c10992.08,6703.68) 10992.08,6750.44 cw(c10992.08,6797.2) K3.3@10959.01,6764.14 ; 11032.47,6750.44 ccw(c11032.47,6785.29) R18.2@11057.11,6760.65 ; R18.2@11072.89,6760.65 ccw(c11097.53,6785.29) 11097.53,6750.44 ; P5.2@11432,6562.85 ccw(c11432,6671.13) 11508.56,6594.56 ; P5.2@11472,6522.85 cw(c11556.86,6522.85) 11496.85,6582.85
  Bottom Layer w60: D6.2@10865,6606.58 10865,6670.13 K3.3@10945.31,6750.44 ; D6.2@10880.28,6606.58 cw(c11070.56,6606.58) K3.3@10936.01,6741.14
NetF3_1: F3.1 P3.2 | length 1063.6
  Bottom Layer w40: F3.1@10727,7226.06 ccw(c10727,7344.48) 10810.74,7260.74 ; F3.1@10735,7185 10852.85,7302.85 P3.2@11432,7302.85 P3.2@11450,7302.85 ; F3.1@10766.06,7187 cw(c10836.2,7187) 10786.6,7236.6 ; P3.2@11421.72,7274.57 ccw(c11353.43,7206.28) 11353.43,7302.85 ccw(c11353.43,7399.42) P3.2@11421.72,7331.13
NetLD1_1: LD1.1 R1.1 | length 365.1
  Bottom Layer w15: LD1.1@7468,5689 R1.1@7579.69,5689 ; LD1.1@7479.93,5677.07 cw(c7508.73,5648.27) 7508.73,5689 cw(c7508.73,5729.73) LD1.1@7479.93,5700.93 ; LD1.1@7490.54,5666.46 cw(c7544.94,5612.06) 7544.94,5689 cw(c7544.94,5765.94) LD1.1@7490.54,5711.54 ; R1.1@7566.9,5676.21 ccw(c7536.02,5645.33) 7536.02,5689 ccw(c7536.02,5732.67) R1.1@7566.9,5701.79
NetLD2_1: LD2.1 R8.1 | length 229.7
  Bottom Layer w40: LD2.1@11150,4919.63 cw(c11150,4800.44) R8.1@11234.28,4884.72 ; LD2.1@11150,4939 11180,4939 R8.1@11255,4864
NetLD3_1: LD3.1 R10.1 | length 415.6
  Bottom Layer w40: LD3.1@9918,4139.63 cw(c9918,4068.72) 9968.14,4118.86 ; LD3.1@9928,4159 9984,4103 R10.1@10264.69,4103
NetLD4_1: LD4.1 R13.1 | length 214.7
  Bottom Layer w40: LD4.1@11071,5929 11181,5929 R13.1@11186,5924 ; LD4.1@11084.7,5915.3 cw(c11117.76,5882.24) 11117.76,5929 cw(c11117.76,5975.76) LD4.1@11084.7,5942.7 ; 11154.97,5929 cw(c11154.97,5898.22) R13.1@11176.74,5919.98
NetLD5_1: LD5.1 R15.1 | length 223.3
  Bottom Layer w40: LD5.1@10536.13,4969.59 ccw(c10444.01,4892.7) R15.1@10444,5012.69 10520.31,5012.69 LD5.1@10550,4983
NetLD6_1: LD6.1 R18.1 | length 165.9
  Bottom Layer w40: LD6.1@11051.3,6922.3 cw(c11018.24,6889.24) 11065,6889.24 cw(c11111.76,6889.24) LD6.1@11078.7,6922.3 ; R18.1@11064,6844 11065,6845 LD6.1@11065,6936
NetLD7_1: LD7.1 R20.1 | length 307
  Bottom Layer w40: LD7.1@10639,6023 10683,6023 ; LD7.1@10639.87,6042.35 ccw(c10645.95,6178.04) 10742,6082 10683,6023 ; LD7.1@10653.29,6009.92 cw(c10683,5982.72) 10683,6023 ; LD7.1@10653.29,6036.08 ccw(c10683,6063.28) 10683,6023
NetR5_2: R5.2 U3.17 | length 248.1
  Bottom Layer w15: U3.17@8270.17,5054 R5.2@8449.69,5054 ; R5.2@8436.9,5041.21 ccw(c8406.02,5010.33) 8406.02,5054 ccw(c8406.02,5097.67) R5.2@8436.9,5066.79
NetR7_1: R7.1 U4.8 | length 252.9
  Bottom Layer w15: R7.1@7275.21,5142.27 cw(c7244.33,5111.39) 7288,5111.39 cw(c7331.67,5111.39) R7.1@7300.79,5142.27 ; 7288,5099.18 ccw(c7325.68,5099.18) U4.8@7299.04,5072.54 ; R7.1@7288,5159 7288,5084 ; U4.8@7290.83,5070.78 ccw(c7279.21,5075.21) 7288,5084 ; U4.8@7296.4,5073.92 cw(c7298.25,5084) 7288,5084 ; U4.8@7333,5069 7303,5069 7288,5084
NetR9_1: R9.1 U2.4 | length 2458.4
  Bottom Layer w15: U2.4@7777.42,6598.42 ccw(c7739.82,6560.82) 7739.82,6614 ccw(c7739.82,6667.18) U2.4@7777.42,6629.58 ; U2.4@7793,6614 7687.79,6614 7489.79,6416 7341.28,6416 7292,6465.28 7292,7096 7367,7171 8167,7171 ; 8188.28,7149.72 ccw(c8230.04,7191.49) R9.1@8238.26,7133 ; 8209.55,7128.45 ccw(c8235.29,7154.18) R9.1@8240.35,7118.14 ; R9.1@8217,7121 8167,7171 ; R9.1@8236.18,7147.85 cw(c8224.8,7228.79) 8167,7171
NetR9_2: R9.2 U5.1 | length 526
  Bottom Layer w15: R9.2@8325.31,7126 8652,7126 U5.1@8657,7121 ; R9.2@8338.1,7113.21 cw(c8368.98,7082.33) 8368.98,7126 cw(c8368.98,7169.67) R9.2@8338.1,7138.79 ; 8574.68,7126 cw(c8574.68,7038.68) U5.1@8636.42,7100.42 ; 8610.89,7126 cw(c8610.89,7074.89) U5.1@8647.03,7111.03 ; U5.1@8622.96,7126 ccw(c8622.96,7145.04) U5.1@8636.42,7131.58
NetR11_2: R11.2 U5.4 | length 3271.1
  Bottom Layer w20: U5.4@8838.19,6698.65 cw(c8804.86,6665.31) 8852,6665.31 cw(c8899.14,6665.31) U5.4@8865.81,6698.65 ; U5.4@8852,6741.98 8852,5758 10009,4601 10425.31,4601 R11.2@10497,4529.31 ; 10463.66,4562.64 cw(c10430.33,4529.31) R11.2@10477.47,4529.31 ; R11.2@10473.17,4553.14 ccw(c10493.06,4573.03) R11.2@10493.06,4544.9
NetR14_1: R14.1 U2.5 | length 2495.8
  Bottom Layer w15: U2.5@7777.42,6498.42 ccw(c7739.82,6460.82) 7739.82,6514 ccw(c7739.82,6567.18) U2.5@7777.42,6529.58 ; U2.5@7793,6514 7651.43,6514 7508.43,6371 7322.64,6371 7247,6446.64 7247,7114.64 7348.36,7216 8237,7216 R14.1@8242,7221 ; R14.1@8225.9,7203.21 ccw(c8195.02,7172.33) 8195.02,7216 ccw(c8195.02,7259.67) R14.1@8225.9,7228.79
NetR14_2: R14.2 U6.1 | length 871.6
  Bottom Layer w15: R14.2@8325.31,7216 8562,7216 8612,7266 U6.1@9017,7266 U6.1@9012,7261 ; R14.2@8338.1,7203.21 cw(c8368.98,7172.33) 8368.98,7216 cw(c8368.98,7259.67) R14.2@8338.1,7228.79 ; U6.1@9001.42,7250.42 ccw(c8963.82,7212.82) 8963.82,7266 ccw(c8963.82,7319.18) U6.1@9001.42,7281.58
NetR16_2: R16.2 U6.4 | length 2445.6
  Bottom Layer w15: U6.4@9201.42,6846.88 cw(c9163.82,6809.28) 9217,6809.28 cw(c9270.18,6809.28) U6.4@9232.58,6846.88 ; U6.4@9217,6891.98 9217,6123 9738,5602 10424.31,5602 R16.2@10496,5530.31 ; 10458.4,5567.91 cw(c10420.79,5530.31) R16.2@10473.97,5530.31 ; 10467.9,5558.41 ccw(c10492.06,5582.57) R16.2@10492.06,5548.4
NetR19_1: R19.1 U2.6 | length 2714.6
  Bottom Layer w15: U2.6@7777.42,6398.42 ccw(c7739.82,6360.82) 7739.82,6414 ccw(c7739.82,6467.18) U2.6@7777.42,6429.58 ; U2.6@7793,6414 7615.07,6414 7527.07,6326 7304,6326 7202,6428 7202,7133.28 7329.72,7261 8167,7261 ; 8188.28,7282.28 cw(c8230.04,7240.51) R19.1@8238.26,7299 ; 8209.55,7303.55 cw(c8235.29,7277.82) R19.1@8240.35,7313.86 ; R19.1@8219.5,7313.5 8167,7261 ; R19.1@8236.18,7284.15 ccw(c8224.8,7203.21) 8167,7261
NetR19_2: R19.2 U7.1 | length 1271.5
  Bottom Layer w15: R19.2@8325.31,7306 8512,7306 8622,7416 9392,7416 U7.1@9397,7411 ; R19.2@8338.1,7293.21 cw(c8368.98,7262.33) 8368.98,7306 cw(c8368.98,7349.67) R19.2@8338.1,7318.79 ; 9326.75,7416 cw(c9326.75,7345.75) U7.1@9376.42,7395.42 ; 9350.89,7416 ccw(c9350.89,7452.11) U7.1@9376.42,7426.58
NetR21_2: R21.2 U7.4 | length 1320.2
  Bottom Layer w15: U7.4@9576.42,6991.88 cw(c9538.82,6954.28) 9592,6954.28 cw(c9645.18,6954.28) U7.4@9607.58,6991.88 ; U7.4@9592,7036.98 9592,6933 9897,6628 10428.31,6628 R21.2@10500,6556.31 ; 10462.4,6593.91 cw(c10424.79,6556.31) R21.2@10477.97,6556.31 ; 10471.9,6584.41 ccw(c10496.06,6608.57) R21.2@10496.06,6574.4
RXCAN: U3.2 U4.4 | length 612.4
  Bottom Layer w15: U4.4@7583,4919 7968,4919 8013,4964 8013,5014 7973,5054 U3.2@7915.83,5054
TXCAN: U3.1 U4.1 | length 359.8
  Bottom Layer w15: U4.1@7583,5069 7748,5069 7813,5004 U3.1@7915.83,5004
USART_RTS: C9.2 P1.1 | length 337
  Bottom Layer w15: P1.1@7478,6899 7493,6914 C9.2@7604.69,6914 ; P1.1@7482.97,6894.03 cw(c7531.18,6845.82) 7531.18,6914 ; P1.1@7493.58,6883.42 cw(c7567.39,6809.61) 7567.39,6914 ; C9.2@7591.9,6901.21 ccw(c7561.02,6870.33) 7561.02,6914 ccw(c7561.02,6957.67) C9.2@7591.9,6926.79
USART_RX: P1.4 U2.2 | length 775.8
  Bottom Layer w15: P1.4@7478,6591.03 ccw(c7478,6659.56) 7526.46,6611.1 ; P1.4@7478,6599 7514.36,6599 ; P1.4@7478,6606.03 ccw(c7478,6710.78) 7552.07,6636.71 ; P1.4@7478,6621.03 ccw(c7478,6761.99) 7577.67,6662.31 ; P1.4@7497.52,6588.8 cw(c7514.36,6580.01) 7514.36,6599 ; P1.4@7497.52,6609.2 ccw(c7514.36,6617.99) 7514.36,6599 ; U2.2@7770.97,6814 cw(c7717.79,6814) 7755.4,6776.4 cw(c7793,6738.79) U2.2@7793,6791.97 ; U2.2@7793,6814 7738,6759 7674.36,6759 7514.36,6599
USART_TX: P1.5 U2.3 | length 571.1
  Bottom Layer w15: P1.5@7478,6499 7693,6714 U2.3@7793,6714 ; P1.5@7478,6521.03 ccw(c7478,6574.21) 7515.6,6536.6 ccw(c7553.21,6499) P1.5@7500.03,6499 ; U2.3@7777.42,6698.42 ccw(c7739.82,6660.82) 7739.82,6714 ccw(c7739.82,6767.18) U2.3@7777.42,6729.58
VBATAUX: C10.2 R2.1 R4.2 U2.23 | length 1388.1
  Top Layer w15: v1(8223,6474) v1(8403,6474) ; v1@8235.37,6461.63 cw(c8265.25,6431.75) 8265.25,6474 cw(c8265.25,6516.25) v1@8235.37,6486.37 ; v1@8390.63,6461.63 ccw(c8360.75,6431.75) 8360.75,6474 ccw(c8360.75,6516.25) v1@8390.63,6486.37
  Bottom Layer w15: U2.23@8093,6414 8163,6414 v1(8223,6474) ; U2.23@8108.58,6398.42 cw(c8146.18,6360.82) 8146.18,6414 cw(c8146.18,6467.18) U2.23@8108.58,6429.58 ; v1@8205.5,6474 cw(c8163.25,6474) 8193.13,6444.13 cw(c8223,6414.25) v1@8223,6456.5 ; R2.1@8390.21,6537.9 cw(c8359.33,6507.02) 8403,6507.02 cw(c8446.67,6507.02) R2.1@8415.79,6537.9 ; v1@8390.63,6486.37 ccw(c8360.75,6516.25) 8403,6516.25 ccw(c8445.25,6516.25) v1@8415.37,6486.37 ; v1@8393,6484 v1(8403,6474) R2.1@8403,6544 ; v1@8403,6456.5 cw(c8403,6414.25) 8432.87,6444.13 cw(c8462.75,6474) v1@8420.5,6474 ; v1@8404,6473 8477,6400 C10.2@8500.69,6400 ; v1@8407.15,6457 cw(c8411.83,6437.8) 8422.1,6454.69 ; v1@8420,6478.15 ccw(c8482.89,6493.5) 8449.27,6438.17 ; 8422.64,6454.36 ccw(c8500.69,6532.41) C10.2@8500.69,6422.03 ; 8448.25,6428.75 ccw(c8500.69,6481.19) C10.2@8500.69,6407.03 ; 8473.86,6403.14 ccw(c8500.69,6429.98) C10.2@8500.69,6392.03 ; R4.2@8500.69,6283.31 R4.2@8501,6283
  Bottom Layer w30: R4.2@8500.69,6283.31 C10.2@8500.69,6400
XTAL1: C7.2 U2.9 Y1.1 | length 848.9
  Bottom Layer w15: C7.2@7443,6114 Y1.1@7591.94,6114 ; C7.2@7455.79,6101.21 cw(c7486.67,6070.33) 7486.67,6114 cw(c7486.67,6157.67) C7.2@7455.79,6126.79 ; 7511.97,6114 ccw(c7511.97,6196.09) Y1.1@7570.02,6138.04 ; 7517.1,6114 cw(c7517.1,6039.17) Y1.1@7570.02,6092.08 ; 7548.19,6114 ccw(c7548.19,6159.88) Y1.1@7580.63,6127.44 ; Y1.1@7593,6115.06 U2.9@7791.94,6115.06 ; Y1.1@7605.37,6102.69 cw(c7635.25,6072.81) 7635.25,6115.06 cw(c7635.25,6157.31) Y1.1@7605.37,6127.44 ; Y1.1@7615.98,6092.08 cw(c7671.46,6036.6) 7671.46,6115.06 cw(c7671.46,6193.52) Y1.1@7615.98,6138.04 ; 7737.25,6115.06 cw(c7737.25,6058.25) U2.9@7777.42,6098.42 ; 7742.39,6115.06 ccw(c7742.39,6164.61) U2.9@7777.42,6129.58
XTAL2: C8.2 U2.10 Y1.2 | length 896.2
  Bottom Layer w15: C8.2@7449.06,5922.94 Y1.2@7593,5922.94 ; C8.2@7455.79,5912.27 cw(c7481.54,5886.52) 7481.54,5922.94 ; C8.2@7455.79,5937.85 ccw(c7491.81,5973.87) 7491.81,5922.94 ; Y1.2@7570.02,5899.96 ccw(c7514.54,5844.48) 7514.54,5922.94 ccw(c7514.54,6001.4) Y1.2@7570.02,5945.92 ; Y1.2@7580.63,5910.56 ccw(c7550.75,5880.69) 7550.75,5922.94 ccw(c7550.75,5965.19) Y1.2@7580.63,5935.31 ; Y1.2@7593,5934 7673,6014 U2.10@7793,6014 ; Y1.2@7593,5955.44 ccw(c7593,6007.19) 7629.6,5970.6 ; Y1.2@7610.5,5922.94 cw(c7679.46,5922.94) 7630.7,5971.7 ; Y1.2@7625.5,5922.94 cw(c7730.67,5922.94) 7656.3,5997.3 ; U2.10@7777.42,5998.42 ccw(c7739.82,5960.82) 7739.82,6014 ccw(c7739.82,6067.18) U2.10@7777.42,6029.58
pads on no net: J1.6 J2.6 K1.2 K2.2 K3.2 P1.3 U2.11 U2.13 U2.15 U2.21 U2.24 U2.25 U2.26 U2.27 U2.28 U3.3 U3.4 U3.5 U3.6 U3.10 U3.11 U4.5 U5.3 U5.6 U6.3 U6.6 U7.3 U7.6

## Polygon pours and split planes (outlines as drawn)
CAN_GND on Bottom Layer "Top Layer-GND" (solid, remove dead copper, shelved, pour order 0): 5783,7806.55 5783,3606.55 8813.62,3606.55 8813.62,4366.55 8678.62,4501.55 8678.62,5886.55 8533.62,6031.55 8533.62,6721.55 8658.62,6846.55 8728.62,6846.55 8918.62,7036.55 9158.62,7036.55 9338.62,7216.55 9563.62,7216.55 9728.62,7381.55 9728.62,7806.55

## Keep-outs
Mechanical 13:
  the board outline again, w10

## Other copper
Bottom Layer:
  rectangle net -BAT_AUX: 8574,6117 8704,6200

## Silkscreen, mask and mechanical layers (free items; w line width, h text height)
Top Overlay:
  text "CAN" at 5802,5436 h157.48 r270
Mechanical 13:
  lines w5: 8815,3610 8815,4370 8680,4505 8680,5890 8535,6035 8535,6725 8660,6850 8730,6850 8920,7040 9160,7040 9340,7220 9565,7220 9730,7385 9730,7810

## Text inside footprints (layer, text, board x,y; h text height)
C2: Top Overlay "-" at 6946,7212.8 h59.06 r270; Top Overlay "+" at 6946,7352.8 h59.06 r270
C3: Top Overlay "-" at 6957.1,6955 h59.06; Top Overlay "+" at 6817.1,6955 h59.06